# EAGLE board board design (EAGLE 7.6.0)
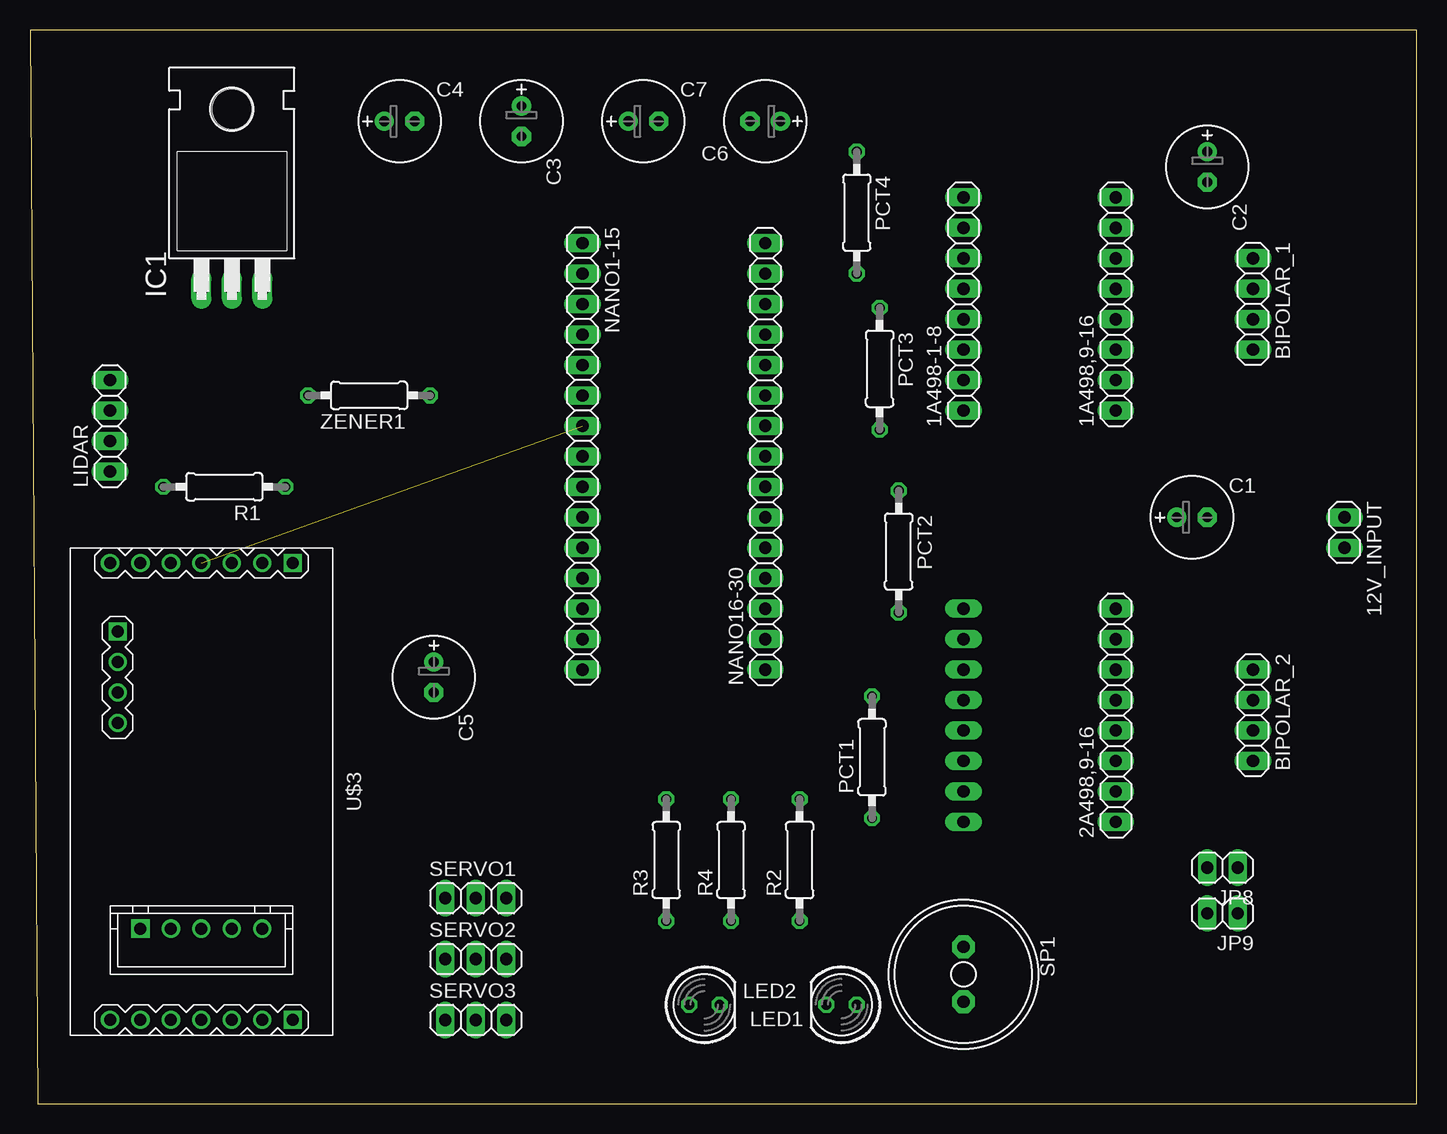
[diagram p0: board, top side]
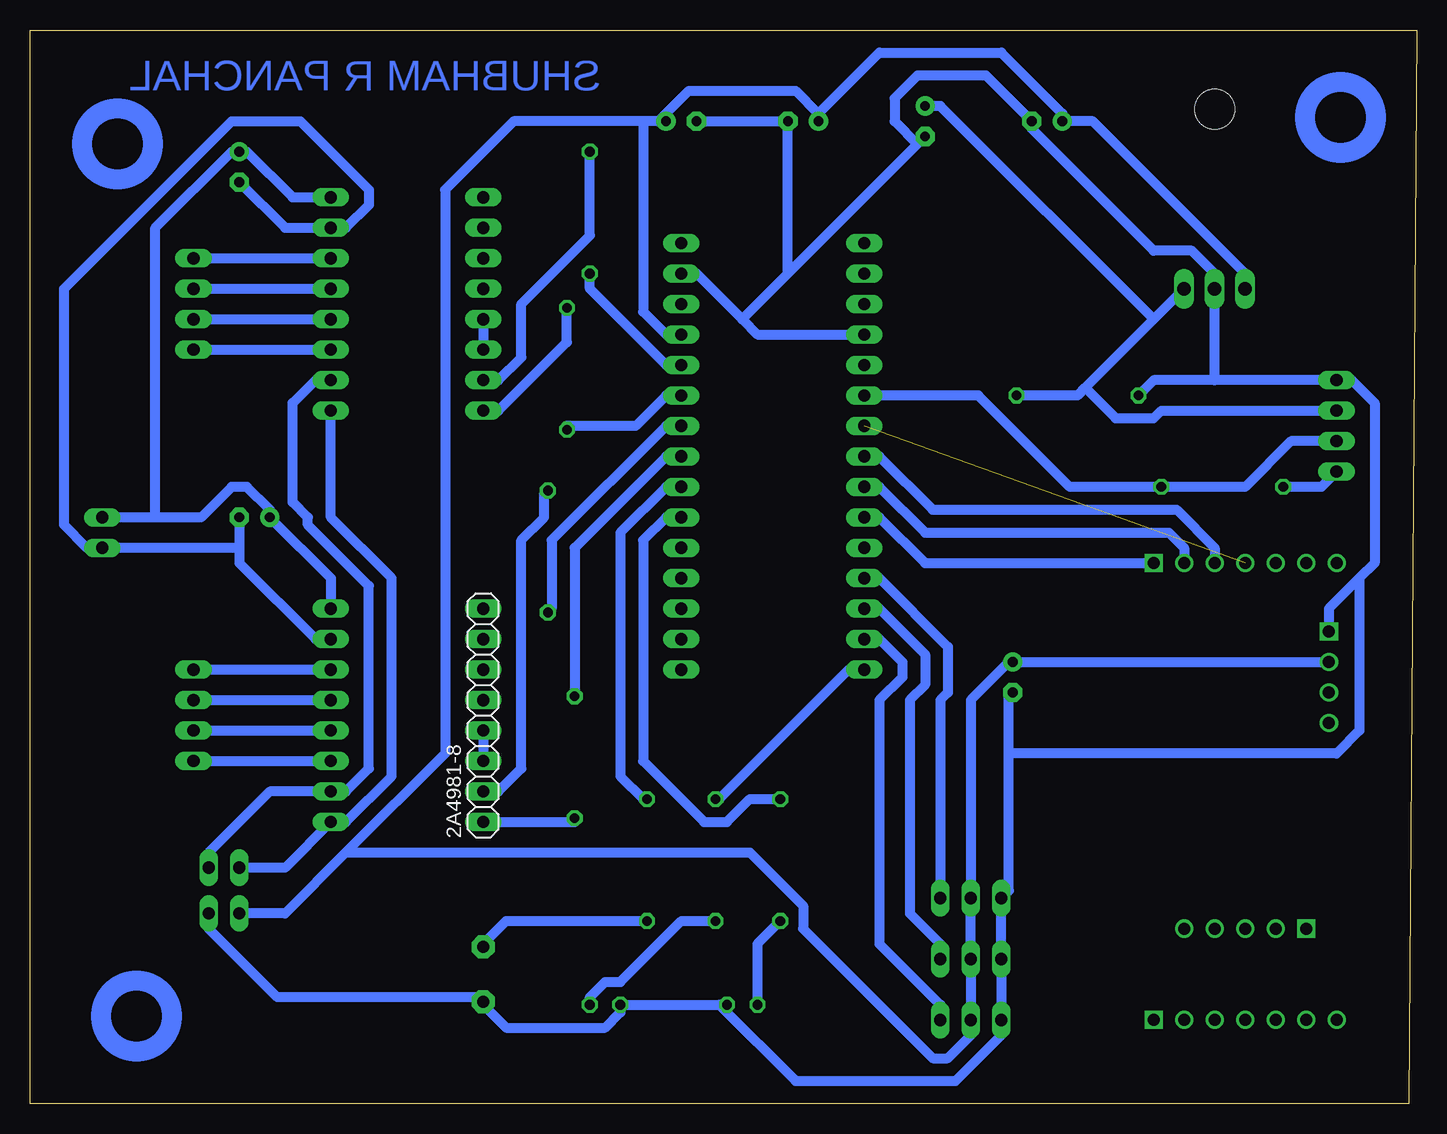
[diagram p1: board, bottom side, seen from below]

Size 115.55 x 89.52 mm. Coordinates in mm from the lower left corner, seen from the top.
Outline: 0.64,0 115.55,0 115.55,89.52 0,89.52 0.64,0
Copper layers (1*16): Top 0.035mm / dielectric 1.5mm / Bottom 0.035mm
Design rules "default": minimum track width 10mil, minimum drill 24mil, track to track 8mil, track to pad 8mil, pad to pad 8mil, via to via 8mil, smd to smd 8mil, copper to edge 40mil, drill to drill 8mil, minimum pad ring 10mil, minimum via ring 8mil, stop-mask expansion 4mil, vias tented up to drill 0mil, thermal gap 10mil
Net classes: 0 default: width 0.813 mm, drill 0.813 mm, clearance 0.813 mm

## Footprints (pad centres in the part's own frame; a part is rotated, then mirrored left to right if it is on the bottom)
1X08 = drill 1.016 long: 1 -8.89,0; 2 -6.35,0; 3 -3.81,0; 4 -1.27,0; 5 1.27,0; 6 3.81,0; 7 6.35,0; 8 8.89,0
1X02 = drill 1.016 long: 1 -1.27,0; 2 1.27,0
1X04 = drill 1.016 long: 1 -3.81,0; 2 -1.27,0; 3 1.27,0; 4 3.81,0
E2,5-7 = drill 0.813 pad 1.6: + -1.27,0 | drill 0.813 pad 1.6 octagon: - 1.27,0
TO220H = drill 1.118 long: 1 -2.54,-10.16; 2 0,-10.16; 3 2.54,-10.16 | hole 3.302: 0,4.826
LED5MM = drill 0.813 octagon: A -1.27,0; K 1.27,0
1X15 = drill 1.016 long: 1 -17.78,0; 2 -15.24,0; 3 -12.7,0; 4 -10.16,0; 5 -7.62,0; 6 -5.08,0; 7 -2.54,0; 8 0,0; 9 2.54,0; 10 5.08,0; 11 7.62,0; 12 10.16,0; 13 12.7,0; 14 15.24,0; 15 17.78,0
0207/10 = drill 0.813 octagon: 1 -5.08,0; 2 5.08,0
1X03 = drill 1.016 long: 1 -2.54,0; 2 0,0; 3 2.54,0
AL11P = drill 1.016 pad 1.905 octagon: + 2.286,0; - -2.286,0
DRIVER-ULN2003#MC = drill 1 square: J1.1 -19.05,7.62; J2.1 19.05,7.62; J3.1 -13.335,-6.985; P3.1 11.43,-5.08 | drill 1: J1.2 -19.05,5.08; J1.3 -19.05,2.54; J1.4 -19.05,0; J1.5 -19.05,-2.54; J1.6 -19.05,-5.08; J1.7 -19.05,-7.62; J2.2 19.05,5.08; J2.3 19.05,2.54; J2.4 19.05,0; J2.5 19.05,-2.54; J2.6 19.05,-5.08; J2.7 19.05,-7.62; J3.2 -10.795,-6.985; J3.3 -8.255,-6.985; J3.4 -5.715,-6.985; P3.2 11.43,-2.54; P3.3 11.43,0; P3.4 11.43,2.54; P3.5 11.43,5.08

## Placement (x,y rotation side)
1A498,9-16  [1X08]  90.49,66.67 90 top
1A498-1-8  [1X08]  77.79,66.67 90 top
2A498,9-16  [1X08]  90.49,32.38 90 top
2A4981-8  [1X08]  77.79,32.38 90 bottom
12V_INPUT  [1X02]  109.54,47.62 270 top
BIPOLAR_1  [1X04]  101.92,66.67 270 top
BIPOLAR_2  [1X04]  101.92,32.38 270 top
C1  [E2,5-7]  96.84,48.9 0 top
C2  [E2,5-7]  98.11,78.11 270 top
C3  [E2,5-7]  40.96,81.92 270 top
C4  [E2,5-7]  30.8,81.92 0 top
C5  [E2,5-7]  33.65,35.56 270 top
C6  [E2,5-7]  61.28,81.92 180 top
C7  [E2,5-7]  51.12,81.92 0 top
IC1  7805T  [TO220H]  16.83,78.11 0 top
JP8  [1X02]  99.38,19.68 180 top
JP9  [1X02]  99.38,15.88 180 top
LED1  [LED5MM]  67.63,8.26 180 top
LED2  [LED5MM]  56.2,8.26 0 top
LIDAR  [1X04]  6.67,56.52 90 top
NANO1-15  [1X15]  46.04,53.98 270 top
NANO16-30  [1X15]  61.28,53.98 90 top
PCT1  [0207/10]  70.17,28.89 90 top
PCT2  [0207/10]  72.39,46.04 270 top
PCT3  [0207/10]  70.8,61.28 270 top
PCT4  [0207/10]  68.9,74.3 270 top
R1  [0207/10]  16.19,51.44 180 top
R2  [0207/10]  64.14,20.32 90 top
R3  [0207/10]  53.02,20.32 90 top
R4  [0207/10]  58.42,20.32 90 top
SERVO1  [1X03]  37.15,17.14 0 top
SERVO2  [1X03]  37.15,12.07 0 top
SERVO3  [1X03]  37.15,6.98 0 top
SP1  AL11P  [AL11P]  77.79,10.79 270 top
U$3  DRIVER-ULN2003#MC  [DRIVER-ULN2003#MC]  14.29,26.04 270 top
ZENER1  [0207/10]  28.26,59.05 180 top

## Library data of the parts
1A498,9-16 1A498-1-8 2A498,9-16 2A4981-8 12V_INPUT BIPOLAR_1 BIPOLAR_2 JP8 JP9 LIDAR NANO1-15 NANO16-30 SERVO1-SERVO3 = pinhead
C1-C7 = rcl
IC1 = linear
LED1 LED2 = led
PCT1-PCT4 R1-R4 ZENER1 = resistor
SP1 = buzzer; OC_FARNELL: unknown; OC_NEWARK: unknown
U$3 = uln2003

## Nets
5V: C4.+ C5.+ C6.+ C7.+ IC1.1 JP9.2 NANO16-30.12 SERVO1.2 SERVO2.2 SERVO3.2 U$3.J3.2
GND: C3.- C4.- C5.- C6.- C7.- IC1.2 JP9.1 LED1.K LED2.K LIDAR.4 NANO1-15.4 NANO16-30.14 SERVO1.1 SERVO2.1 SERVO3.1 SP1.+ U$3.J3.1 ZENER1.2
GUC: 1A498,9-16.1 2A498,9-16.1 JP8.2
N$1: NANO1-15.7 U$3.J1.4
N$2: NANO1-15.8 U$3.J1.3
N$3: NANO1-15.9 U$3.J1.2
N$4: NANO1-15.10 U$3.J1.1
N$5: NANO16-30.7 R2.2
N$6: LED2.A R3.1
N$7: 1A498-1-8.2 PCT4.1
N$8: NANO16-30.8 PCT1.2
N$9: 2A498,9-16.6 BIPOLAR_2.1
N$10: 2A498,9-16.5 BIPOLAR_2.2
N$11: 2A498,9-16.4 BIPOLAR_2.3
N$12: 2A498,9-16.3 BIPOLAR_2.4
N$13: 1A498,9-16.6 BIPOLAR_1.1
N$14: 1A498,9-16.5 BIPOLAR_1.2
N$15: 1A498,9-16.4 BIPOLAR_1.3
N$16: 1A498,9-16.3 BIPOLAR_1.4
N$17: LED1.A R4.1
N$18: NANO1-15.15 R4.2
N$19: R2.1 SP1.-
N$20: LIDAR.2 NANO1-15.6 R1.1
N$21: LIDAR.1 R1.2
N$22: 1A498,9-16.7 2A498,9-16.7 12V_INPUT.2 C1.- C2.-
N$23: 2A4981-8.3 2A4981-8.4
N$24: 1A498-1-8.3 1A498-1-8.4
N$25: 1A498,9-16.8 2A498,9-16.8 12V_INPUT.1 C1.+ C2.+
N$26: NANO1-15.12 SERVO1.3
N$27: NANO1-15.13 SERVO2.3
N$28: NANO1-15.14 SERVO3.3
N$29: NANO16-30.11 PCT4.2
N$30: NANO16-30.10 PCT3.2
N$31: NANO16-30.9 PCT2.2
N$32: 2A4981-8.1 PCT1.1
N$33: NANO16-30.6 R3.2
N$34: 2A4981-8.2 PCT2.1
N$35: 1A498-1-8.1 PCT3.1
N$37: C3.+ IC1.3 LIDAR.3 ZENER1.1
VUC: 1A498,9-16.2 2A498,9-16.2 JP8.1

## Tracks (layer width: path | path; a pad name or v marks a point on that pad's centre or on a via)
5V
  Bottom 0.813: U$3.J3.2 C5.+ 33.97,36.83 37.15,33.66 SERVO1.2 SERVO2.2 SERVO3.2 37.15,5.71 39.05,3.81 40.32,3.81 51.12,14.61 51.12,16.51 55.56,20.95 89.22,20.95 | IC1.1 14.29,69.22 26.99,81.92 C4.+ 29.53,82.55 34.61,87.63 44.77,87.63 49.85,82.55 | JP9.2 94.3,15.88 89.22,20.95 | 89.22,20.95 80.96,29.21 80.96,76.2 75.25,81.92 64.45,81.92 | 63.18,81.92 64.45,81.92 | NANO16-30.12 62.55,64.14 64.45,66.04 64.45,81.92 | 49.85,82.55 51.75,84.45 60.64,84.45 63.18,81.92 | 63.18,81.92 C6.+ | 49.85,82.55 C7.+
GND
  Bottom 0.813: 33.97,29.21 33.97,17.78 SERVO1.1 SERVO2.1 SERVO3.1 34.61,5.71 38.42,1.91 51.75,1.91 58.1,8.26 | 33.97,29.21 33.97,34.29 C5.- | 58.1,8.26 LED1.K 66.36,7.62 67.63,6.35 75.88,6.35 77.79,8.26 SP1.+ 77.79,8.89 94.93,8.89 100.65,14.61 JP9.1 | 58.1,8.26 LED2.K | C6.- C7.- 52.39,69.22 | NANO1-15.4 54.93,64.14 56.2,65.41 | 56.2,65.41 60.01,69.22 NANO16-30.14 | 56.2,65.41 52.39,69.22 | 52.39,69.22 41.59,80.01 | 41.59,80.01 C3.- | ZENER1.2 21.91,60.33 16.83,60.33 | 16.83,60.33 LIDAR.4 5.4,60.33 3.49,58.42 3.49,45.09 4.76,43.82 | U$3.J3.1 7.3,41.28 4.76,43.82 | 16.83,60.33 IC1.2 16.83,69.22 18.73,71.12 21.91,71.12 32.07,81.28 C4.- 35.88,85.73 41.59,85.73 43.5,83.82 43.5,81.92 41.59,80.01 | 33.97,29.21 6.67,29.21 4.76,31.11 4.76,43.82
GUC
  Bottom 0.813: JP8.2 94.3,19.68 2A498,9-16.1 89.22,23.49 85.41,27.3 85.41,43.82 90.49,48.9 1A498,9-16.1
N$1  (1 unrouted)
N$2
  Bottom 0.813: U$3.J1.3 16.83,46.36 20,49.53 40.32,49.53 44.77,53.98 NANO1-15.8
N$3
  Bottom 0.813: U$3.J1.2 19.37,46.36 20.64,47.62 40.96,47.62 44.77,51.44 NANO1-15.9
N$4
  Bottom 0.813: U$3.J1.1 40.96,45.09 44.77,48.9 NANO1-15.10
N$5
  Bottom 0.813: NANO16-30.7 62.55,51.44 66.36,47.62 66.36,27.3 64.45,25.4 R2.2
N$6
  Bottom 0.813: LED2.A 54.93,13.34 R3.1
N$7
  Bottom 0.813: PCT4.1 68.9,72.39 74.61,66.67 74.61,62.23 76.52,60.33 1A498-1-8.2
N$8
  Bottom 0.813: PCT1.2 70.17,46.36 62.55,53.98 NANO16-30.8
N$9
  Bottom 0.813: BIPOLAR_2.1 2A498,9-16.6
N$10
  Bottom 0.813: BIPOLAR_2.2 2A498,9-16.5
N$11
  Bottom 0.813: BIPOLAR_2.3 2A498,9-16.4
N$12
  Bottom 0.813: BIPOLAR_2.4 2A498,9-16.3
N$13
  Bottom 0.813: BIPOLAR_1.1 1A498,9-16.6
N$14
  Bottom 0.813: BIPOLAR_1.2 1A498,9-16.5
N$15
  Bottom 0.813: BIPOLAR_1.3 1A498,9-16.4
N$16
  Bottom 0.813: BIPOLAR_1.4 1A498,9-16.3
N$17
  Bottom 0.813: R4.1 61.28,15.24 66.36,10.16 67.63,10.16 68.9,8.89 LED1.A
N$18
  Bottom 0.813: NANO1-15.15 47.31,36.2 58.1,25.4 R4.2
N$19
  Bottom 0.813: R2.1 75.88,15.24 77.79,13.34 SP1.-
N$20
  Bottom 0.813: LIDAR.2 10.48,55.25 14.29,51.44 R1.1 28.89,51.44 36.51,59.05 NANO1-15.6
N$21
  Bottom 0.813: R1.2 7.94,51.44 LIDAR.1
N$22
  Bottom 0.813: C2.- 94.3,73.03 1A498,9-16.7 89.22,73.03 87.31,74.93 87.31,76.2 93.03,81.92 98.74,81.92 112.71,67.95 112.71,48.26 110.81,46.36 12V_INPUT.2 98.11,46.36 | 2A498,9-16.7 91.76,38.73 98.11,45.09 98.11,46.36 | C1.- 98.11,46.36
N$23
  Bottom 0.813: 2A4981-8.4 2A4981-8.3
N$24
  Bottom 0.813: 1A498-1-8.4 1A498-1-8.3
N$25
  Bottom 0.813: 1A498,9-16.8 93.66,75.56 97.47,79.38 C2.+ 98.74,79.38 105.09,73.03 105.09,48.9 | 2A498,9-16.8 90.49,43.82 C1.+ 95.57,49.53 97.47,51.44 98.74,51.44 101.28,48.9 105.09,48.9 | 105.09,48.9 12V_INPUT.1
N$26
  Bottom 0.813: SERVO1.3 39.69,33.66 39.05,34.29 39.05,38.1 44.77,43.82 NANO1-15.12
N$27
  Bottom 0.813: SERVO2.3 39.69,13.34 42.23,15.88 42.23,33.66 40.96,34.92 40.96,37.47 44.77,41.28 NANO1-15.13
N$28
  Bottom 0.813: SERVO3.3 39.69,8.26 44.77,13.34 44.77,33.66 42.86,35.56 42.86,36.83 44.77,38.73 NANO1-15.14
N$29
  Bottom 0.813: PCT4.2 68.9,67.95 62.55,61.59 NANO16-30.11
N$30
  Bottom 0.813: NANO16-30.10 62.55,59.05 65.09,56.52 70.8,56.52 PCT3.2
N$31
  Bottom 0.813: NANO16-30.9 62.55,56.52 72.07,46.99 72.07,41.28 PCT2.2
N$32
  Bottom 0.813: 2A4981-8.1 70.17,23.49 PCT1.1
N$33
  Bottom 0.813: R3.2 55.56,25.4 57.47,23.49 59.37,23.49 64.45,28.57 64.45,46.99 62.55,48.9 NANO16-30.6
N$34
  Bottom 0.813: 2A4981-8.2 76.52,26.04 74.61,27.94 74.61,46.99 72.71,48.9 72.71,50.8 PCT2.1
N$35
  Bottom 0.813: PCT3.1 70.8,63.5 76.52,57.79 1A498-1-8.1
N$37
  Bottom 0.813: ZENER1.1 28.26,59.05 27.62,59.69 | IC1.3 21.91,65.41 | 21.91,65.41 27.62,59.69 | LIDAR.3 21.27,57.79 21.91,57.15 25.08,57.15 27.62,59.69 | C3.+ 39.69,83.19 21.91,65.41
VUC
  Bottom 0.813: JP8.1 100.65,20.95 95.57,26.04 2A498,9-16.2 89.22,26.04 87.31,27.94 87.31,43.18 92.39,48.26 92.39,48.9 93.66,50.16 93.66,58.42 91.76,60.33 1A498,9-16.2
(copper drawn outside any net)
  shapes: Bottom circle x3

## Text on the board
Bottom: SHUBHAM R PANCHAL